# EAGLE board DeviceDOut8 (EAGLE 5.00)
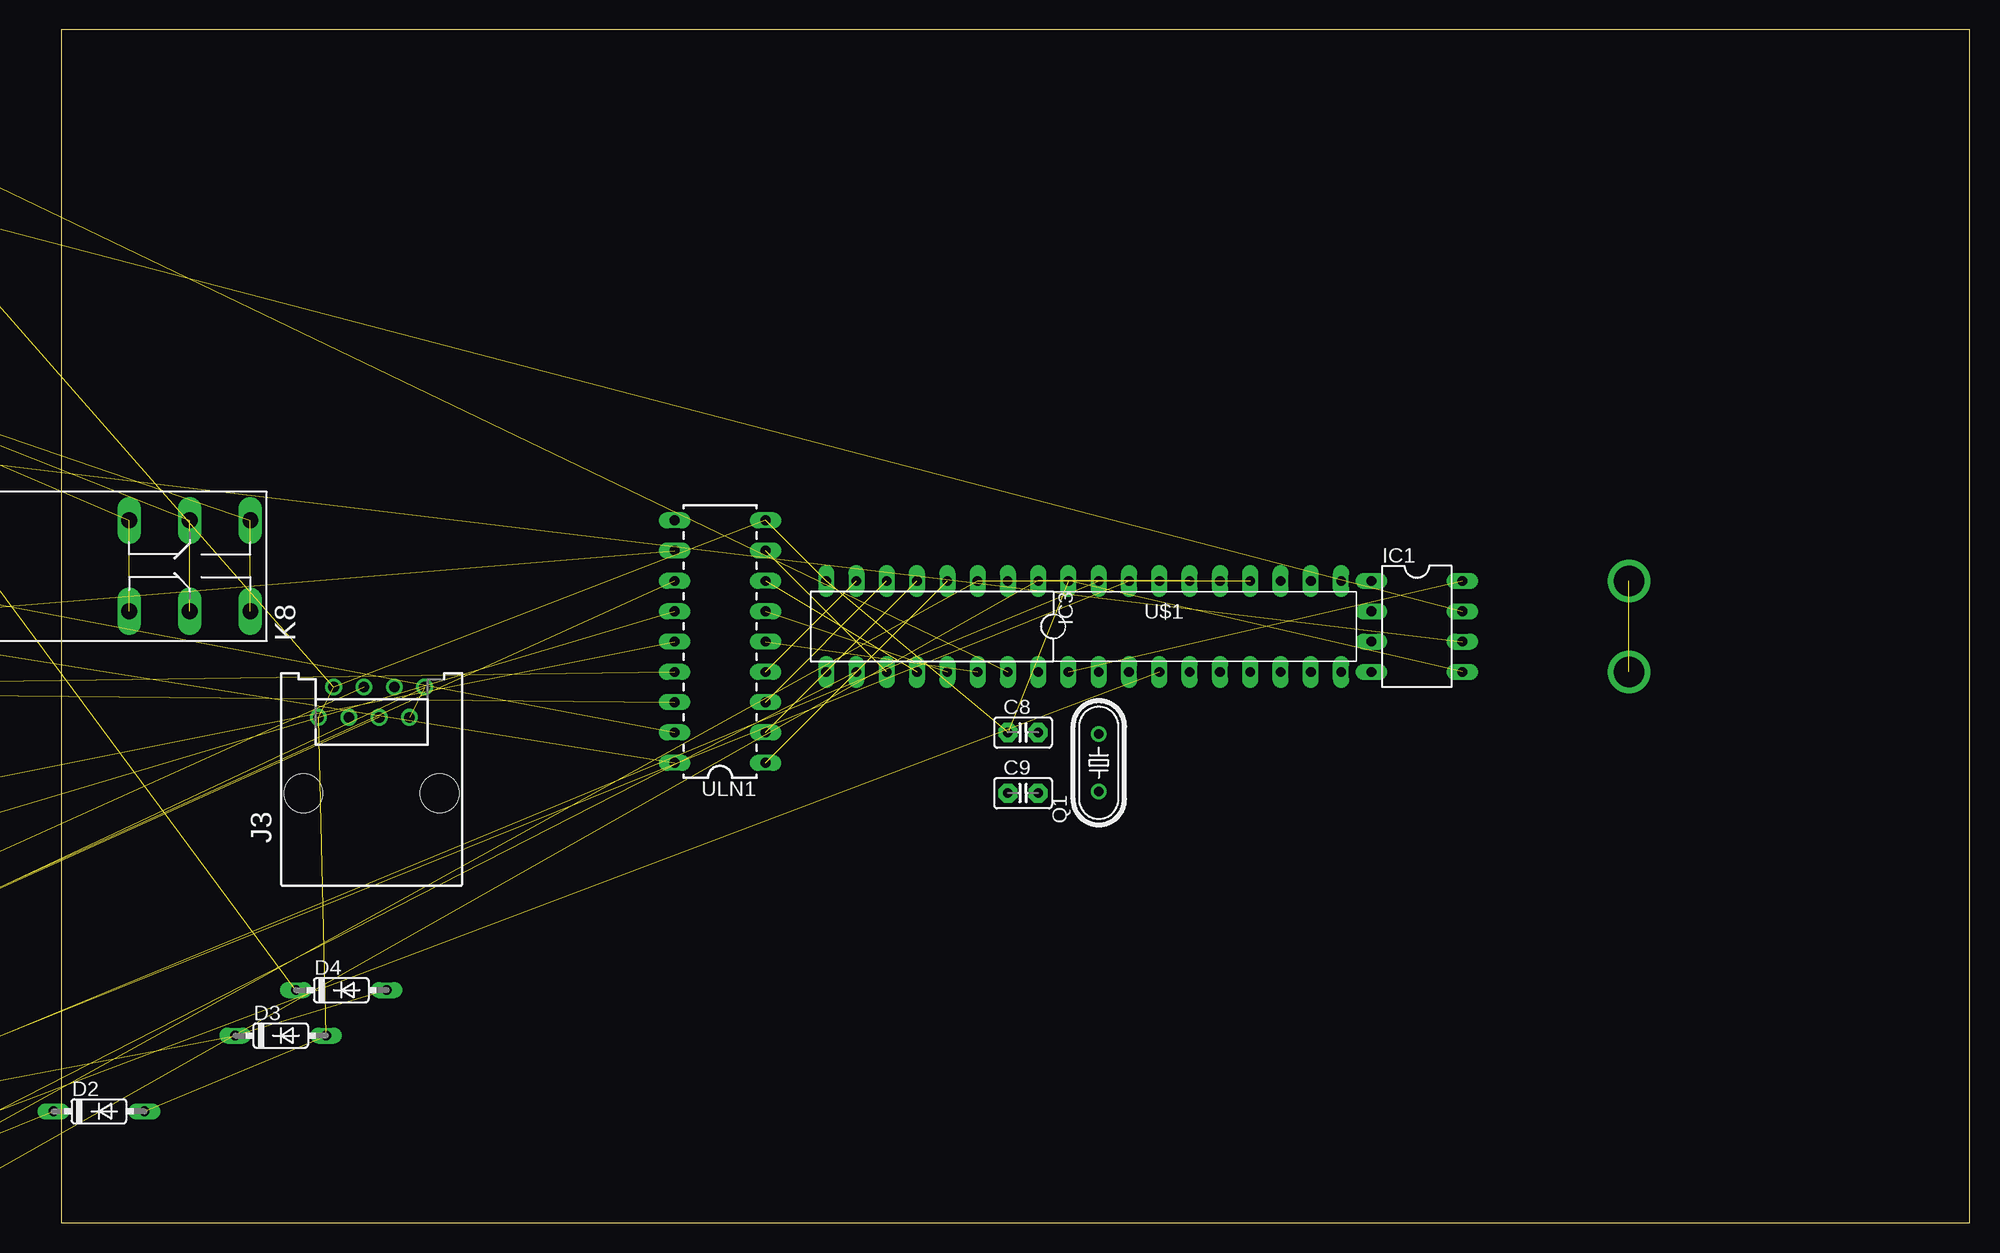
[diagram p0: board, top side]
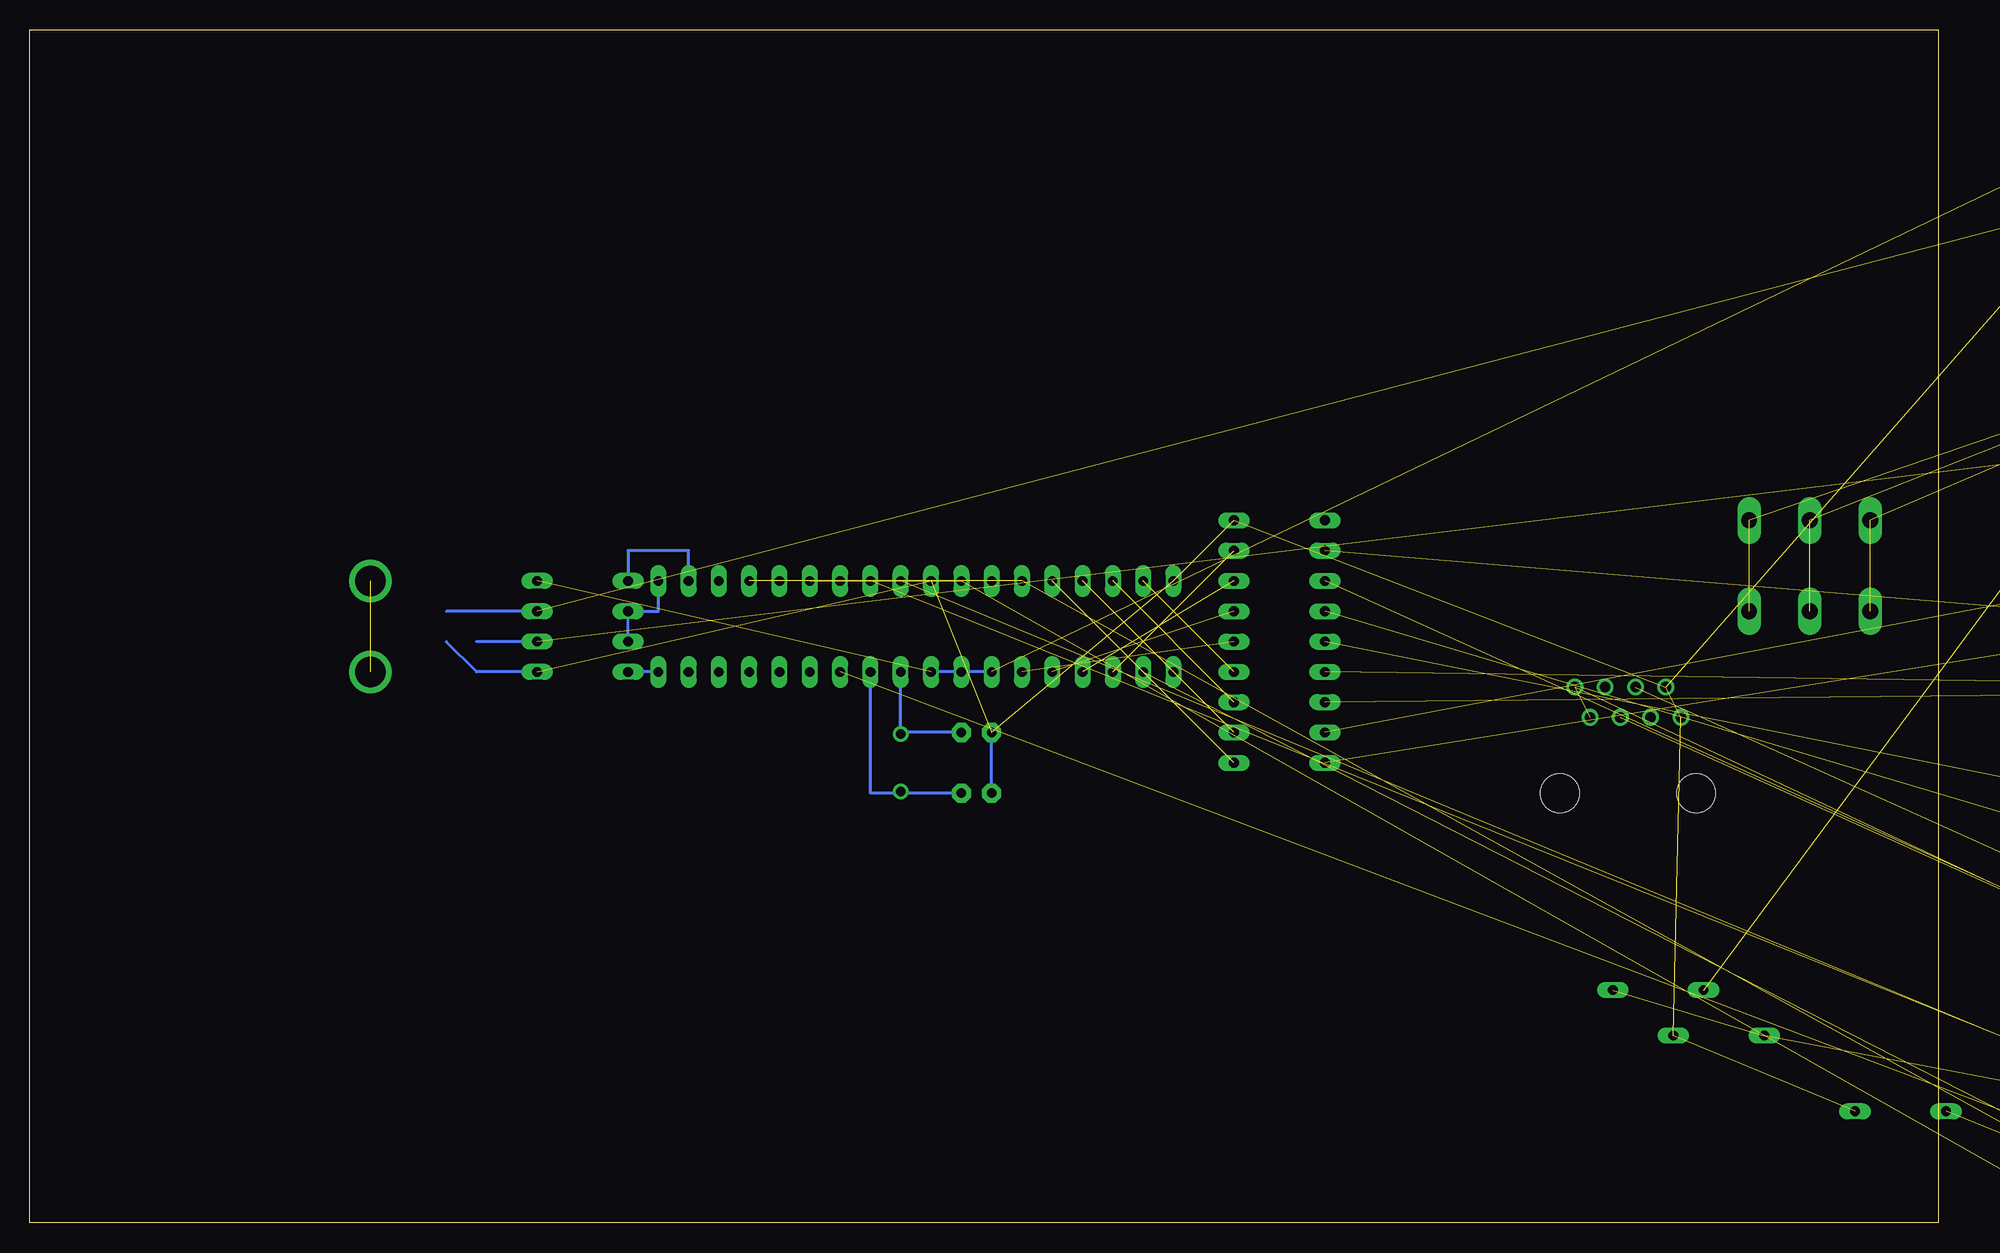
[diagram p1: board, bottom side, seen from below]

Size 160 x 100 mm. Coordinates in mm from the lower left corner, seen from the top.
Outline: 0,0 160,0 160,100 0,100 0,0
Copper layers (1*16): Top 0.035mm / dielectric 1.5mm / Bottom 0.035mm
Design rules "default": minimum track width 10mil, minimum drill 24mil, track to track 8mil, track to pad 8mil, pad to pad 8mil, via to via 8mil, smd to smd 8mil, copper to edge 40mil, drill to drill 8mil, minimum pad ring 10mil, minimum via ring 8mil, stop-mask expansion 4mil, vias tented up to drill 0mil, thermal gap 10mil

## Footprints (pad centres in the part's own frame; a part is rotated, then mirrored left to right if it is on the bottom)
CPOL-RADIAL-100UF-25V = drill 0.7 pad 1.651 square: 1 1.27,0 | drill 0.7 pad 1.651 round: 2 -1.27,0
C2.5-2 = drill 0.813 pad 1.6 octagon: 1 -1.27,0; 2 1.27,0
DO35-7 = drill 0.813 long: A 3.81,0; C -3.81,0
DIL08 = drill 0.813 long: 1 -3.81,-3.81; 2 -1.27,-3.81; 3 1.27,-3.81; 4 3.81,-3.81; 5 3.81,3.81; 6 1.27,3.81; 7 -1.27,3.81; 8 -3.81,3.81
DIL16 = drill 0.813 long: 1 -8.89,-3.81; 2 -6.35,-3.81; 3 -3.81,-3.81; 4 -1.27,-3.81; 5 1.27,-3.81; 6 3.81,-3.81; 7 6.35,-3.81; 8 8.89,-3.81; 9 8.89,3.81; 10 6.35,3.81; 11 3.81,3.81; 12 1.27,3.81; 13 -1.27,3.81; 14 -3.81,3.81; 15 -6.35,3.81; 16 -8.89,3.81
78XXS = drill 1.016 long: GND 0,-2.54; IN -2.54,-2.54; OUT 2.54,-2.54
POWER_JACK_SLOT = drill 1 pad 2 long: GND@1 2.58,7.5; GND@2 7.58,10.8; PWR 2.58,13.8
215877-4 = drill 0.889 round: 1 -4.445,6.35; 2 -3.175,8.89; 3 -1.905,6.35; 4 -0.635,8.89; 5 0.635,6.35; 6 1.905,8.89; 7 3.175,6.35; 8 4.445,8.89 | hole 3.251: -5.715,0; 5.715,0
F4052 = drill 1.321 long: 1 -3.81,3.81; 2 -3.81,-3.81; O1 11.43,-3.81; O2 11.43,3.81; P1 16.51,-3.81; P2 16.51,3.81; S1 21.59,-3.81; S2 21.59,3.81
2,15/1,0 = drill 1.016 pad 2.159 octagon: 1 0,0
HC49/S = drill 0.813 round: 1 -2.413,0; 2 2.413,0
0204/5 = drill 0.813 octagon: 1 -2.54,0; 2 2.54,0
DIL20 = drill 0.813 long: 1 -11.43,-3.81; 2 -8.89,-3.81; 3 -6.35,-3.81; 4 -3.81,-3.81; 5 -1.27,-3.81; 6 1.27,-3.81; 7 3.81,-3.81; 8 6.35,-3.81; 9 8.89,-3.81; 10 11.43,-3.81; 11 11.43,3.81; 12 8.89,3.81; 13 6.35,3.81; 14 3.81,3.81; 15 1.27,3.81; 16 -1.27,3.81; 17 -3.81,3.81; 18 -6.35,3.81; 19 -8.89,3.81; 20 -11.43,3.81
MOLEX-1X6 = drill 1.016 pad 1.88 square: 1 0,0 | drill 1.016 pad 1.88 round: 2 2.54,0; 3 5.08,0; 4 7.62,0; 5 10.16,0; 6 12.7,0
DIL18 = drill 0.813 long: 1 -10.16,-3.81; 2 -7.62,-3.81; 3 -5.08,-3.81; 4 -2.54,-3.81; 5 0,-3.81; 6 2.54,-3.81; 7 5.08,-3.81; 8 7.62,-3.81; 9 10.16,-3.81; 10 10.16,3.81; 11 7.62,3.81; 12 5.08,3.81; 13 2.54,3.81; 14 0,3.81; 15 -2.54,3.81; 16 -5.08,3.81; 17 -7.62,3.81; 18 -10.16,3.81

## Placement (x,y rotation side)
C1  100uf ???  [CPOL-RADIAL-100UF-25V]  -78.11,80.48 0 top  (outside the outline)
C2  10uf  [CPOL-RADIAL-100UF-25V]  -85.73,80.48 0 top  (outside the outline)
C3  100nf  [C2.5-2]  -28.58,91.91 0 top  (outside the outline)
C4  100nf  [C2.5-2]  -34.93,91.91 0 top  (outside the outline)
C5  10nf  [C2.5-2]  -40.01,91.91 0 top  (outside the outline)
C6  10nf  [C2.5-2]  -45.09,91.91 0 top  (outside the outline)
C7  10nf  [C2.5-2]  -50.17,91.91 0 top  (outside the outline)
C8  [C2.5-2]  80.64,41.11 0 top
C9  [C2.5-2]  80.64,36.03 0 top
D1  1N4148DO35-7  [DO35-7]  -98.43,-28.74 0 top  (outside the outline)
D2  1N4148DO35-7  [DO35-7]  3.17,9.36 0 top
D3  1N4148DO35-7  [DO35-7]  18.41,15.71 0 top
D4  1N4148DO35-7  [DO35-7]  23.49,19.52 0 top
IC1  LTC485N  [DIL08]  113.66,50 270 top
IC3  4094N  [DIL16]  73.02,50 180 top
IC4  [78XXS]  -18.42,94.45 0 top  (outside the outline)
J1  POWER_JACKSLT  [POWER_JACK_SLOT]  -103.51,-16.04 0 top  (outside the outline)
J2  [215877-4]  -78.11,-10.96 0 top  (outside the outline)
J3  [215877-4]  26.03,36.03 0 top
K1  4052  [F4052]  -53.98,8.09 0 top  (outside the outline)
K2  4052  [F4052]  -38.74,27.14 0 top  (outside the outline)
K3  4052  [F4052]  -71.76,27.14 0 top  (outside the outline)
K4  4052  [F4052]  -38.74,41.11 0 top  (outside the outline)
K5  4052  [F4052]  -71.76,41.11 0 top  (outside the outline)
K6  4052  [F4052]  -38.74,55.08 0 top  (outside the outline)
K7  4052  [F4052]  -71.76,55.08 0 top  (outside the outline)
K8  4052  [F4052]  -5.72,55.08 0 top
PAD1  [2,15/1,0]  -17.15,102.07 0 top  (outside the outline)
PAD2  [2,15/1,0]  -23.5,102.07 0 top  (outside the outline)
PAD3  [2,15/1,0]  -29.85,102.07 0 top  (outside the outline)
PAD4  [2,15/1,0]  -36.2,102.07 0 top  (outside the outline)
PAD5  [2,15/1,0]  -42.55,102.07 0 top  (outside the outline)
PAD6  [2,15/1,0]  -48.9,102.07 0 top  (outside the outline)
PAD7  [2,15/1,0]  -55.25,102.07 0 top  (outside the outline)
PAD8  [2,15/1,0]  -61.6,102.07 0 top  (outside the outline)
PAD9  [2,15/1,0]  -67.95,102.07 0 top  (outside the outline)
PAD10  [2,15/1,0]  -57.79,89.37 0 top  (outside the outline)
PAD11  [2,15/1,0]  -85.73,96.99 0 top  (outside the outline)
PAD12  [2,15/1,0]  -65.41,89.37 0 top  (outside the outline)
PAD13  [2,15/1,0]  -73.03,89.37 0 top  (outside the outline)
PAD14  [2,15/1,0]  -80.65,89.37 0 top  (outside the outline)
PAD15  [2,15/1,0]  -88.27,89.37 0 top  (outside the outline)
PAD16  [2,15/1,0]  -17.15,96.99 0 top  (outside the outline)
PAD17  [2,15/1,0]  -24.77,96.99 0 top  (outside the outline)
PAD18  [2,15/1,0]  -32.39,96.99 0 top  (outside the outline)
PAD19  [2,15/1,0]  -102.24,-35.09 0 top  (outside the outline)
PAD20  [2,15/1,0]  -40.01,96.99 0 top  (outside the outline)
PAD21  [2,15/1,0]  -47.63,96.99 0 top  (outside the outline)
PAD22  [2,15/1,0]  -55.25,96.99 0 top  (outside the outline)
PAD23  [2,15/1,0]  -62.87,96.99 0 top  (outside the outline)
PAD24  [2,15/1,0]  -70.49,96.99 0 top  (outside the outline)
PAD25  [2,15/1,0]  -102.24,-40.17 0 top  (outside the outline)
PAD26  [2,15/1,0]  -78.11,96.99 0 top  (outside the outline)
PAD27  [2,15/1,0]  -102.24,-45.25 0 top  (outside the outline)
PAD28  [2,15/1,0]  -102.24,-50.33 0 top  (outside the outline)
PAD29  [2,15/1,0]  -102.24,-55.41 0 top  (outside the outline)
PAD30  [2,15/1,0]  -102.24,-60.49 0 top  (outside the outline)
PAD31  [2,15/1,0]  -102.24,-65.57 0 top  (outside the outline)
PAD32  [2,15/1,0]  -102.24,-70.65 0 top  (outside the outline)
PAD33  [2,15/1,0]  -102.24,-75.73 0 top  (outside the outline)
Q1  [HC49/S]  86.99,38.57 90 top
R1  10K  [0204/5]  -74.3,102.07 0 top  (outside the outline)
R2  ?  [0204/5]  -81.92,102.07 0 top  (outside the outline)
R3  10K  [0204/5]  -29.85,69.05 270 top  (outside the outline)
U$1  PIC16F690IP  [DIL20]  95.88,50 0 top
U$7  PIC-ICSPPTH  [MOLEX-1X6]  -102.24,-22.39 0 top  (outside the outline)
ULN1  [DIL18]  55.24,48.73 90 top

## Library data of the parts
C1 C2 J1 U$7 ULN1 = SparkFun
C3-C9 = capacitor-wima
D1-D4 = diode
IC1 = linear-technology
IC3 = 40xx
IC4 = v-reg
J2 J3 = con-amp
K1-K8 = relay
PAD1-PAD33 = wirepad
Q1 = crystal
R1-R3 = resistor
U$1 = microchip-5

## Nets
5V: C2.1 C4.1 C5.1 C6.1 C7.1 IC1.8 IC3.15 IC3.16 IC4.OUT PAD19.1 R3.1 U$1.1 U$7.5
GND: C1.2 C2.2 C3.2 C4.2 C5.2 C6.2 C7.2 C8.1 C9.1 D2.A D3.A IC1.5 IC3.8 IC4.GND J2.1 J2.2 J3.1 J3.2 PAD29.1 PAD32.1 PAD33.1 R1.2 U$1.20 U$7.4 ULN1.9
N$1: K8.2 ULN1.11
N$2: K1.2 ULN1.12
N$3: K2.2 ULN1.13
N$4: K3.2 ULN1.14
N$5: K4.1 ULN1.15
N$6: K5.1 ULN1.16
N$7: K6.1 ULN1.17
N$8: K7.S1 K7.S2 PAD1.1
N$9: K7.O1 K7.O2 PAD2.1
N$10: IC3.4 ULN1.1
N$11: IC1.6 J2.4 J3.4 R2.2 R3.2
N$12: IC3.5 ULN1.2
N$13: IC3.6 ULN1.3
N$14: IC3.7 ULN1.4
N$15: IC3.14 ULN1.5
N$16: IC3.13 ULN1.6
N$17: IC3.12 ULN1.7
N$18: IC3.11 ULN1.8
N$19: K7.P1 K7.P2 PAD3.1
N$20: U$1.4 U$7.6
N$21: D1.C D4.C K1.1 K2.1 K3.1 K4.2 K5.2 K6.2 K7.2 K8.1 PAD30.1 PAD31.1
N$22: IC3.1 PAD28.1 U$1.16
N$23: K6.P1 K6.P2 PAD4.1
N$24: K7.1 ULN1.18
N$25: IC1.2 IC1.3 U$1.11
N$26: K5.P1 K5.P2 PAD5.1
N$27: K4.P1 K4.P2 PAD6.1
N$28: K2.P1 K2.P2 PAD8.1
N$29: K1.P1 K1.P2 PAD10.1
N$30: K8.P1 K8.P2 PAD11.1
N$31: K8.O1 K8.O2 PAD12.1
N$32: K8.S1 K8.S2 PAD13.1
N$33: K1.S1 K1.S2 PAD15.1
N$34: K2.O1 K2.O2 PAD16.1
N$35: K2.S1 K2.S2 PAD17.1
N$36: K3.O1 K3.O2 PAD18.1
N$37: K3.S1 K3.S2 PAD20.1
N$38: K6.O1 K6.O2 PAD9.1
N$39: K6.S1 K6.S2 PAD26.1
N$40: K1.O1 K1.O2 PAD14.1
N$41: K4.O1 K4.O2 PAD21.1
N$42: K4.S1 K4.S2 PAD22.1
N$43: K5.O1 K5.O2 PAD23.1
N$44: K5.S1 K5.S2 PAD24.1
N$45: K3.P1 K3.P2 PAD7.1
N$46: C1.1 C3.1 IC4.IN J2.7 J2.8 J3.7 J3.8
N$47: IC3.2 U$1.15
N$48: IC3.3 PAD27.1 U$1.14
N$49: IC1.4 U$1.10
N$50: IC1.7 J2.5 J3.5 R1.1 R2.1
N$51: IC1.1 U$1.12
N$52: C8.2 Q1.2 U$1.2
N$53: C9.2 Q1.1 U$1.3
N$55: U$1.18 U$7.2
N$56: U$1.19 U$7.3
N$57: D1.A D2.C J1.PWR
N$58: D3.C D4.A J1.GND@2
N$59: IC3.10 PAD25.1

## Tracks (layer width: path | path; a pad name or v marks a point on that pad's centre or on a via)
5V  (10 unrouted)
  Bottom 0.254: U$1.1 IC3.16 IC3.15
GND  (23 unrouted)
  Bottom 0.254: C9.1 C8.1 | IC1.5 122.55,46.19 125.09,48.73
N$1  (1 unrouted)
N$2  (1 unrouted)
N$3  (1 unrouted)
N$4  (1 unrouted)
N$5  (1 unrouted)
N$6  (1 unrouted)
N$7  (1 unrouted)
N$8  (2 unrouted)
N$9  (2 unrouted)
N$10  (1 unrouted)
N$11  (4 unrouted)
  Bottom 0.254: IC1.6 122.55,48.73
N$12  (1 unrouted)
N$13  (1 unrouted)
N$14  (1 unrouted)
N$15  (1 unrouted)
N$16  (1 unrouted)
N$17  (1 unrouted)
N$18  (1 unrouted)
N$19  (2 unrouted)
N$20  (1 unrouted)
N$21  (11 unrouted)
N$22  (2 unrouted)
N$23  (2 unrouted)
N$24  (1 unrouted)
N$25
  Bottom 0.254: U$1.11 107.31,51.27 IC1.2 IC1.3
N$26  (2 unrouted)
N$27  (2 unrouted)
N$28  (2 unrouted)
N$29  (2 unrouted)
N$30  (2 unrouted)
N$31  (2 unrouted)
N$32  (2 unrouted)
N$33  (2 unrouted)
N$34  (2 unrouted)
N$35  (2 unrouted)
N$36  (2 unrouted)
N$37  (2 unrouted)
N$38  (2 unrouted)
N$39  (2 unrouted)
N$40  (2 unrouted)
N$41  (2 unrouted)
N$42  (2 unrouted)
N$43  (2 unrouted)
N$44  (2 unrouted)
N$45  (2 unrouted)
N$46  (6 unrouted)
N$47  (1 unrouted)
N$48  (2 unrouted)
N$49
  Bottom 0.254: U$1.10 IC1.4
N$50  (4 unrouted)
  Bottom 0.254: IC1.7 125.09,51.27
N$51
  Bottom 0.254: U$1.12 104.77,56.35 109.85,56.35 IC1.1
N$52
  Bottom 0.254: 86.99,41.11 U$1.2 | 86.99,41.11 Q1.2 | C8.2 86.99,41.11
N$53
  Bottom 0.254: 86.99,36.03 89.53,36.03 U$1.3 | 86.99,36.03 Q1.1 | C9.2 86.99,36.03
N$54  (via drill 2.54 pad 1.68)  (1 unrouted)
  other vias: 131.44,53.81 131.44,46.19
N$55  (1 unrouted)
N$56  (1 unrouted)
N$57  (2 unrouted)
N$58  (2 unrouted)
N$59  (1 unrouted)